# Altium PCB Helmet_HUD.PcbDoc
Units mil, origin at the board's own origin, x right, y up, seen from the top; angles counter-clockwise.
Board outline 1673.23 x 2559.06 mil, 4 copper layers (Top Layer, GND_1, GND_2, Bottom Layer), stack 22.378 mil thick; 21 components, 21 nets, 87 pads, 858 vias.
Unrouted connection lines stored in the file: 1.
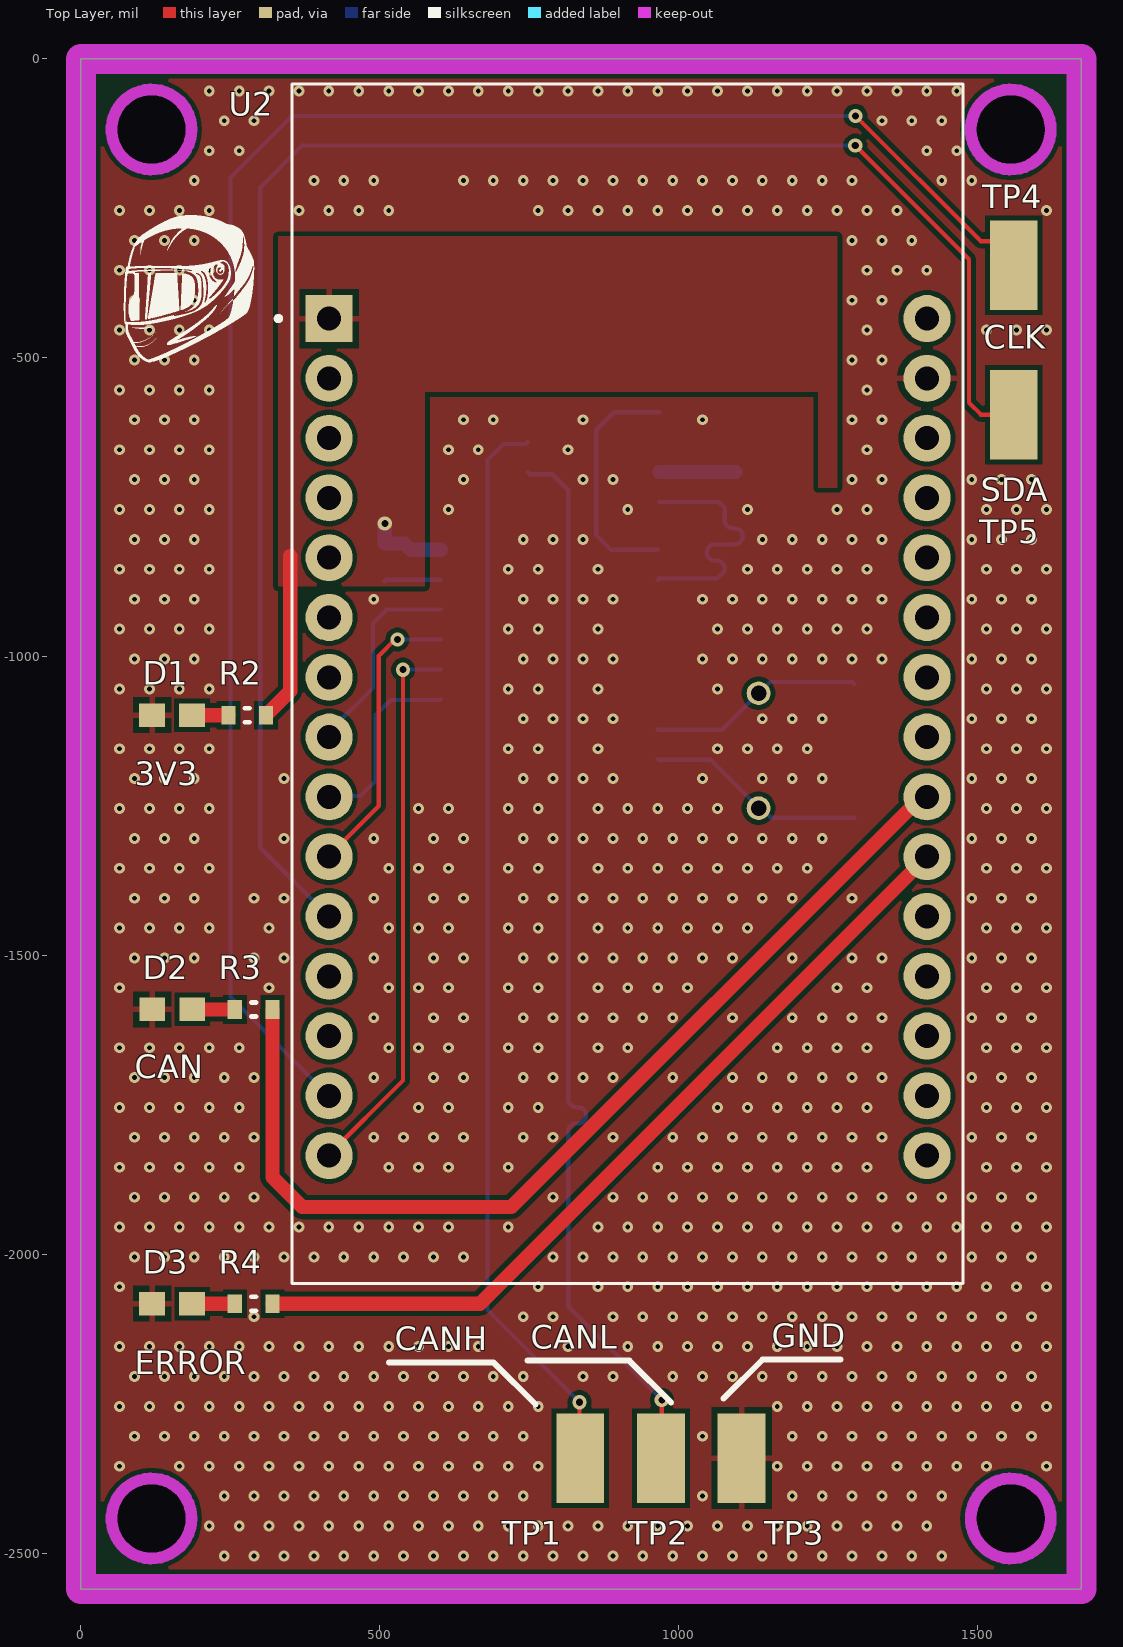
[diagram p0: Top Layer view]
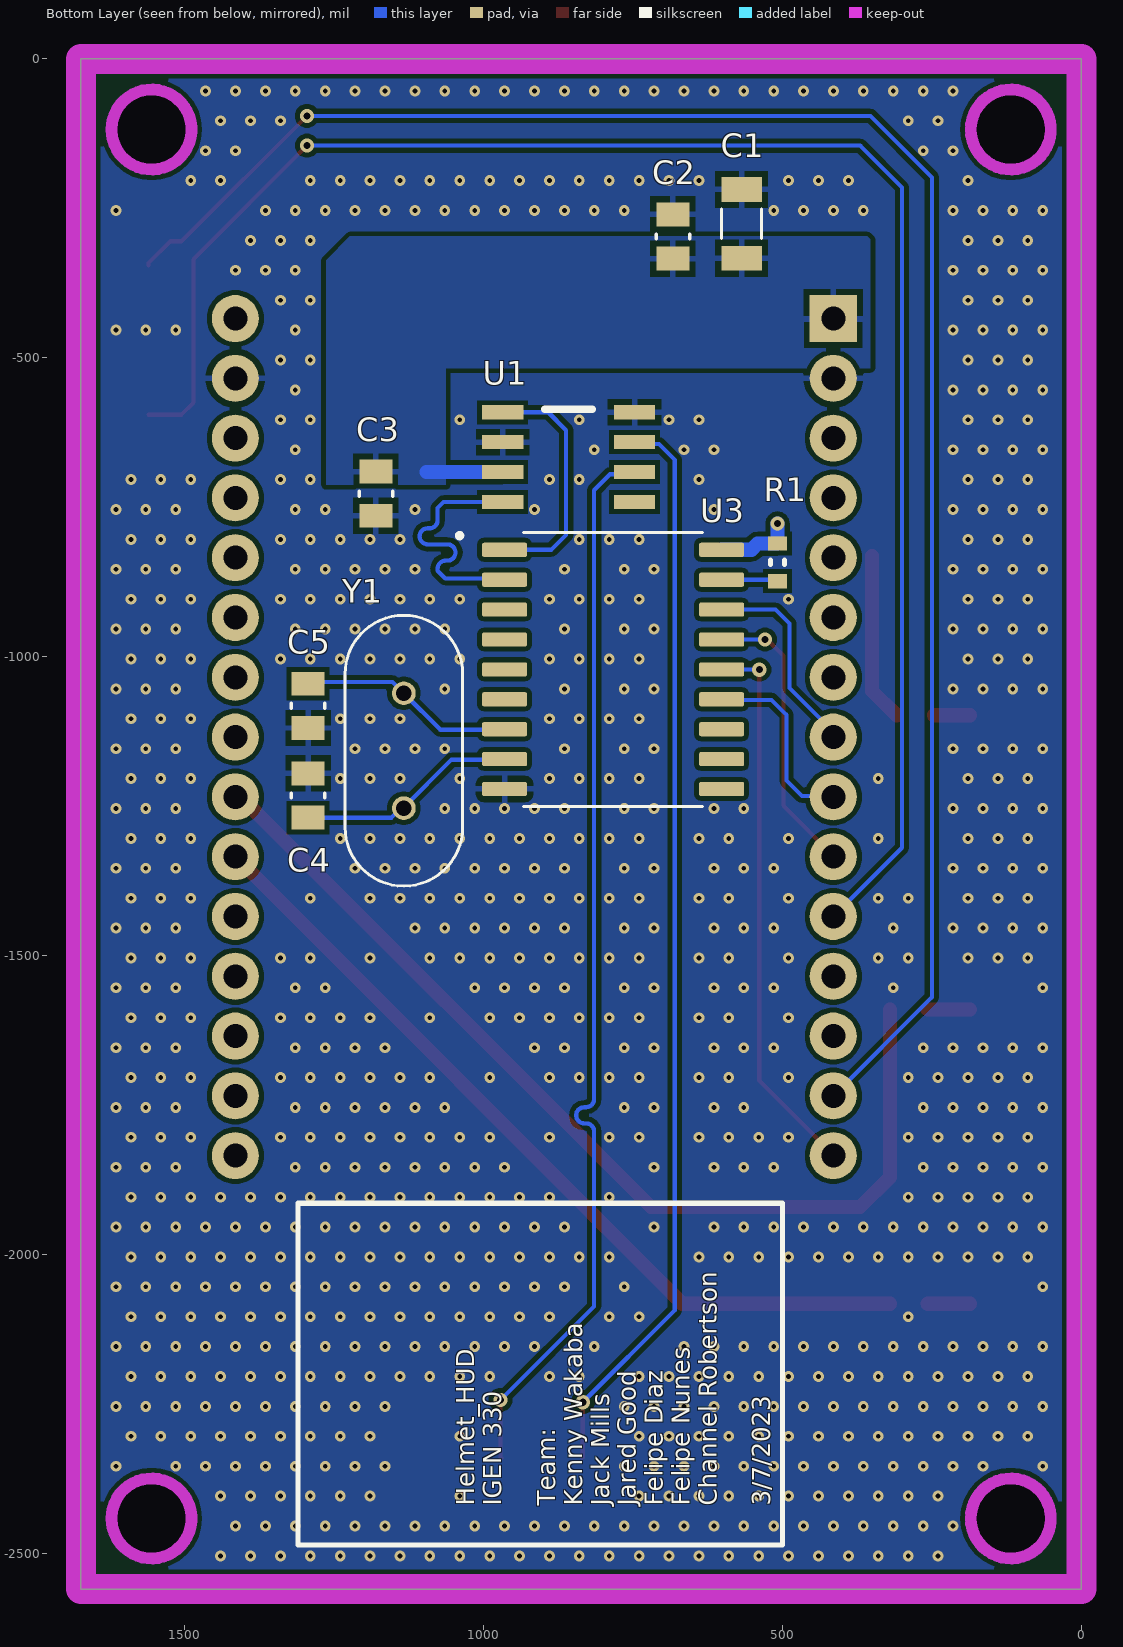
[diagram p1: Bottom Layer view, seen from below]
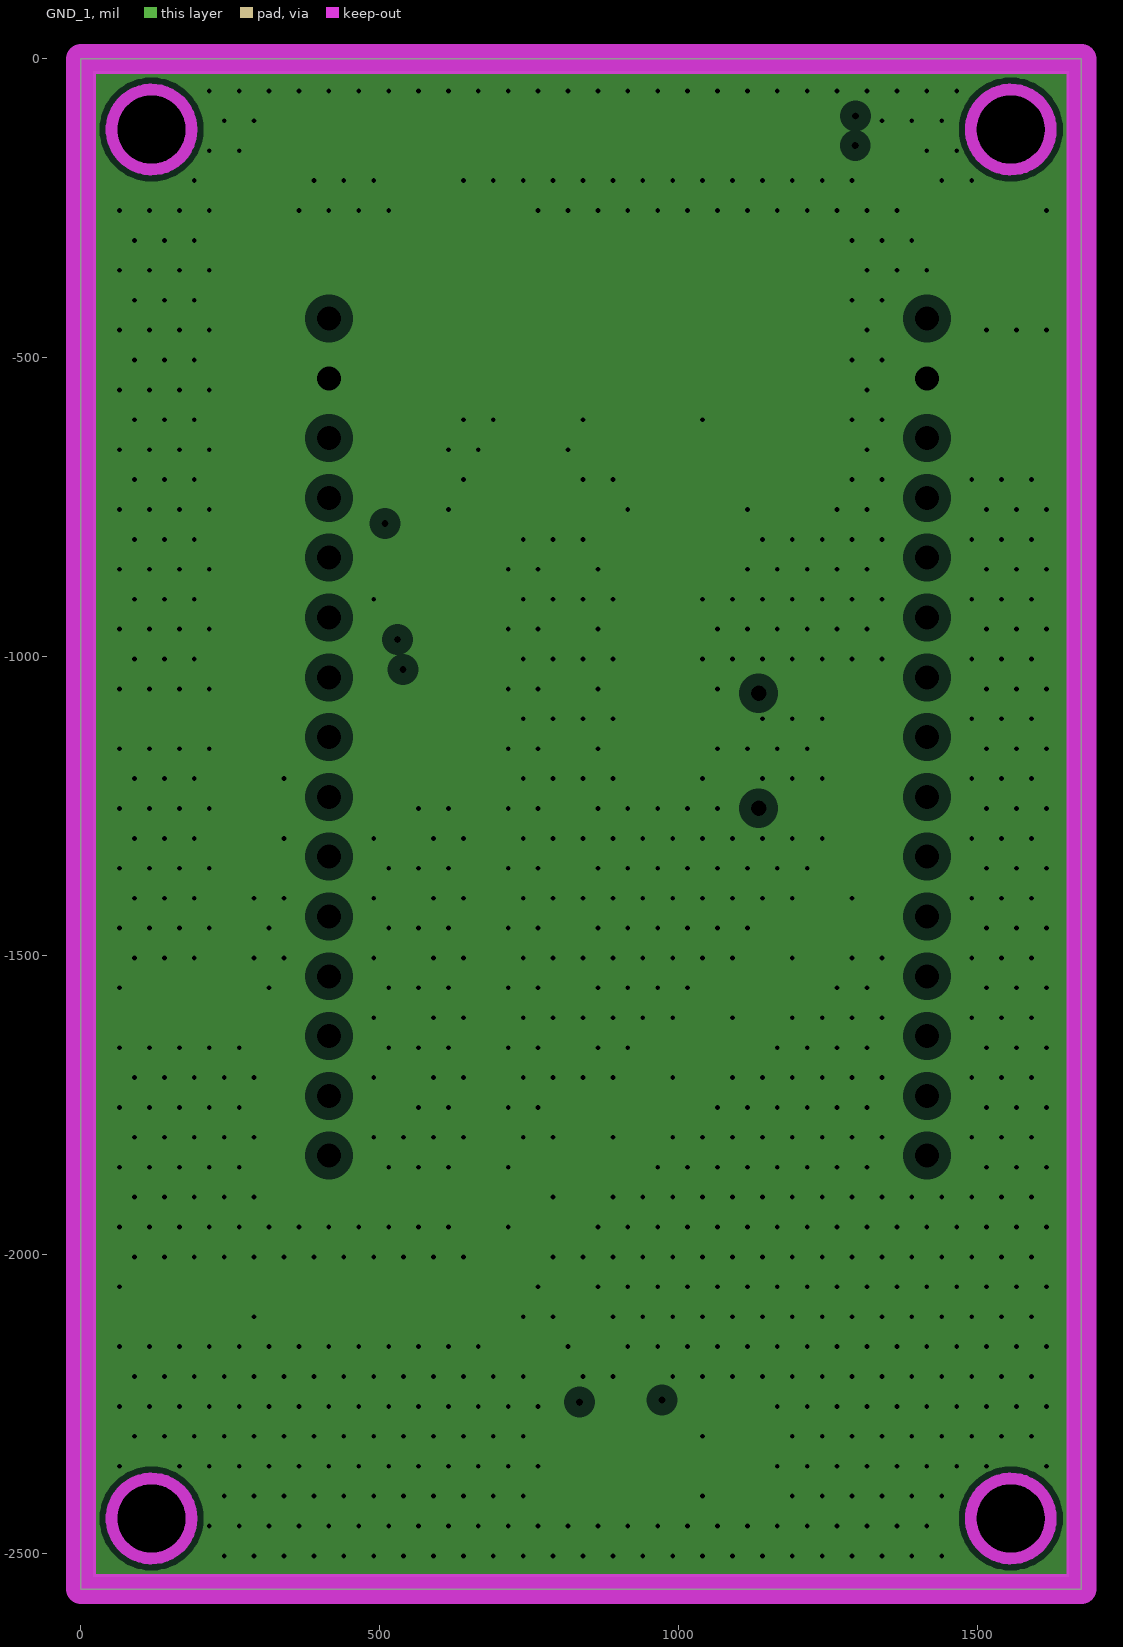
[diagram p2: GND_1, clearances drawn from the general rule]
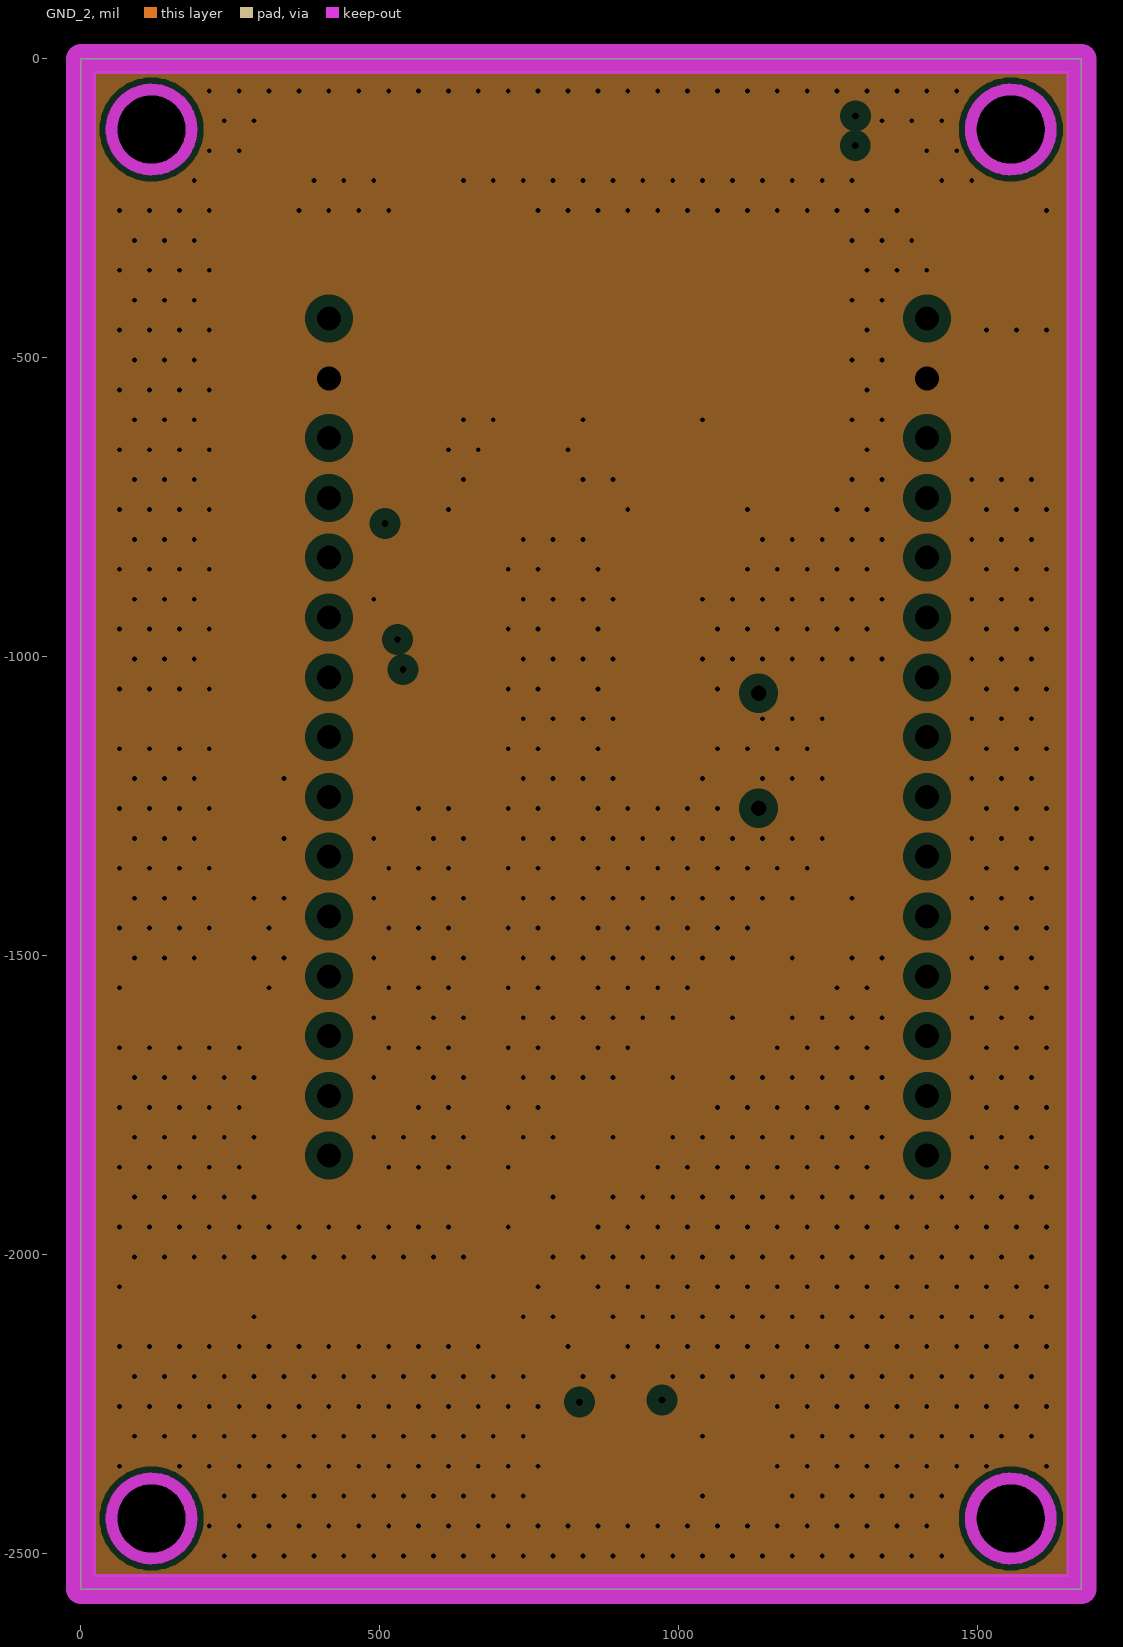
[diagram p3: GND_2, clearances drawn from the general rule]

## Layer stack, top to bottom
Top Solder: solder mask 0.4, Solder Resist, Dk 3.5
Top Layer: signal copper 1.4
Dielectric 2: prepreg 2.8, PP-006, Dk 4.1
GND_1: plane copper 0.689, net GND
Dielectric 1: dielectric 12.6, FR-4, Dk 4.8
GND_2: plane copper 0.689, net GND
Dielectric 3: prepreg 2.8, PP-006, Dk 4.1
Bottom Layer: signal copper 1.4
Bottom Solder: solder mask 0.4, Solder Resist, Dk 3.5

## Board outline
0,-2559.06 0,0 1673.23,0 1673.23,-2559.06
cut-out: 51.18,-118.11 ccw(c118.11,-118.11) 118.11,-185.04 ccw(c118.11,-118.11) 185.04,-118.11 ccw(c118.11,-118.11) 118.11,-51.18 ccw(c118.11,-118.11)
cut-out: 1488.19,-118.11 ccw(c1555.12,-118.11) 1555.12,-185.04 ccw(c1555.12,-118.11) 1622.05,-118.11 ccw(c1555.12,-118.11) 1555.12,-51.18 ccw(c1555.12,-118.11)
cut-out: 1488.19,-2440.94 ccw(c1555.12,-2440.94) 1555.12,-2507.87 ccw(c1555.12,-2440.94) 1622.05,-2440.94 ccw(c1555.12,-2440.94) 1555.12,-2374.02 ccw(c1555.12,-2440.94)
cut-out: 51.18,-2440.94 ccw(c118.11,-2440.94) 118.11,-2507.87 ccw(c118.11,-2440.94) 185.04,-2440.94 ccw(c118.11,-2440.94) 118.11,-2374.02 ccw(c118.11,-2440.94)

## Design rules (kind name [scope] priority, off if disabled: settings)
Clearance [All] p1: gap=7.87 ignorepadtopadclearanceinfootprint=FALSE
DiffPairsRouting [All] p1: maxlimit=10 minlimit=10 mostfreqgap=10 toplayer_minwidth=15 toplayer_maxwidth=15 toplayer_prefwidth=15 bottomlayer_minwidth=15 bottomlayer_maxwidth=15 bottomlayer_prefwidth=15 maxuncoupledlength=500
HoleSize [All] p1: absolutevalues=TRUE maxlimit=100 minlimit=11.81 maxpercent=80.000 minpercent=20.000
HoleToHoleClearance ViaToViaClearance [IsVia vs IsVia] p1: gap=10 allowstackedmicrovias=TRUE
HoleToHoleClearance [All] p2: gap=19.68 allowstackedmicrovias=TRUE
MatchedLengths CAN [InDifferentialPair('CAN')] p1: tolerance=3.94 checknetsindiffpair=FALSE checkdiffpairvsdiffpair=TRUE checkxsignals=TRUE checkothers=TRUE
PlaneClearance [All] p1: clearance=20
PlaneConnect PlaneConnect_Via [IsVia] p1: planeconnectstyle=Direct reliefexpansion=20 reliefentries=4 reliefconductorwidth=10 reliefairgap=10
PlaneConnect [All] p2: planeconnectstyle=Relief reliefexpansion=20 reliefentries=4 reliefconductorwidth=10 reliefairgap=10
PolygonConnect PolygonConnect_Via [IsVia] p1: connectstyle=Direct reliefconductorwidth=10 reliefentries=4 polygonreliefangle="90 Angle" airgapwidth=10
PolygonConnect [All] p2: connectstyle=Relief reliefconductorwidth=10 reliefentries=4 polygonreliefangle="90 Angle" airgapwidth=10
RoutingVias [All] p1: holewidth=28 width=50 viastyle="Through Hole" minholewidth=7.87 minwidth=19.68 maxholewidth=11.81 maxwidth=23.62
SilkToSolderMaskClearance [IsPad] p1: minsilkscreentomaskgap=5.91 clearancetoexposedcopper=TRUE
SolderMaskExpansion SolderMaskExpansion_Via [IsVia] p1: expansion=4 istentingtop=TRUE
SolderMaskExpansion [All] p2: expansion=4 istentingtop=FALSE
Width [All] p1: maxlimit=39.37 minlimit=5 preferedwidth=7.01 minimp=50.000000 maximp=50.000000 favimp=50.000000
24 further rules are at their usual default settings.

## Classes and differential pairs
differential pair CAN: +CAN_P -CAN_N

## Components (designator, comment, footprint, x,y, rotation, side; value= is the part's Value field where it differs from the comment)
C1 "10uF" 1206 568.23,-275.82 r270 bottom
C2 "0.10uF" 0805 683.23,-296.97 r270 bottom
C3 "0.10uF" 0805 1180,-727 r90 bottom
C4 "22pF" 0805 1293.23,-1231.97 r270 bottom
C5 "22pF" 0805 1293.23,-1081.97 r90 bottom
D1 "LTST-C191KGKT" 0603#1 152.53,-1097.59 r0 top
D2 "LTST-C191KGKT" 0603#1 152.7,-1589.71 r0 top
D3 "LTST-C191KGKT" 0603#1 152.63,-2081.84 r0 top
R1 "10k" 0603#2 508.23,-841.97 r90 bottom
R2 "100" 0603#2 278.03,-1097.59 r0 top
R3 "100" 0603#2 288.86,-1589.8 r0 top
R4 "100" 0603#2 288.86,-2081.84 r0 top
TP1 "Test Point - 5019" TP380X203#1 835,-2340 r90 top
TP2 "Test Point - 5019" TP380X203#1 970,-2340 r90 top
TP3 "Test Point - 5019" TP380X203#1 1105,-2340 r90 top
TP4 "Test Point - 5019" TP380X203#2 1560,-345 r270 bottom
TP5 "Test Point - 5019" TP380X203#2 1560,-595 r270 bottom
U1 "TJA1050" SOP8 857.61,-665.97 r270 bottom
U2 "ESP32-DEVKIT-V1" MODULE_ESP32_DEVKIT_V1 915,-1045 r0 top locked
U3 "MCP2515-I/SO" SOIC127P1030X265-18N 783.2,-1020.97 r180 bottom
Y1 "ABL-8.000MHZ-B2" XTAL_HC49P488W46L1150T500H350 1133.23,-1156.97 r90 bottom

## Footprints (in the part's own frame and the unit in brackets; to place one, negate y for a bottom-side part, rotate by r counter-clockwise, add the part's x,y. Pads: shape width x height; smd on the part's side, far side on the other; paste and mask are expansions set on the pad)
0603#1 [mm]
  rect 1.1x1 smd: 1(-0.85,0) 2(0.85,0)
  body extent -0.8,-0.4 0.8,0.4, height 0.55
0603#2 [mm] "Chip Resistor, 2-Leads, Body 1.60x0.80mm, IPC High Density"
  rect 0.6x0.8 smd mask+0.1: 1(-0.8,0) 2(0.8,0)
  silkscreen extent -0.1,-0.3 0.1,0.3, body extent -0.8,-0.4 0.8,0.4, height 0.6
0805 [mil]
  rect 40x55 smd: 1(-37,0) 2(37,0)
  silkscreen extent -4,-28 4,28, body extent -47,-28 47,28, height 24
1206 [mm]
  rect 1.05x1.72 smd: 1(-1.46,0) 2(1.46,0)
  silkscreen extent -0.62,-0.85 0.62,0.85, body extent -1.6,-0.8 1.6,0.8, height 1.61
MODULE_ESP32_DEVKIT_V1 [mm]
  rect 2x2 / inner round 2 / far side rect 2x2 hole 1.02: 1(-12.7,15.515)
  round 2 hole 1.02: 2(-12.7,12.975) 3(-12.7,10.435) 4(-12.7,7.895) 5(-12.7,5.355) 6(-12.7,2.815) 7(-12.7,0.275) 8(-12.7,-2.265) 9(-12.7,-4.805) 10(-12.7,-7.345) 11(-12.7,-9.885) 12(-12.7,-12.425) 13(-12.7,-14.965) 14(-12.7,-17.505) 15(-12.7,-20.045) 16(12.7,-20.045) 17(12.7,-17.505) 18(12.7,-14.965) 19(12.7,-12.425) 20(12.7,-9.885) 21(12.7,-7.345) 22(12.7,-4.805) 23(12.7,-2.265) 24(12.7,0.275) 25(12.7,2.815) 26(12.7,5.355) 27(12.7,7.895) 28(12.7,10.435) 29(12.7,12.975) 30(12.7,15.515)
  silkscreen extent -14.95,-25.48 14.23,25.48
SOIC127P1030X265-18N [mm]
  rrect25% 1.91x0.6 smd: 1(-4.61,5.08) 2(-4.61,3.81) 3(-4.61,2.54) 4(-4.61,1.27) 5(-4.61,0) 6(-4.61,-1.27) 7(-4.61,-2.54) 8(-4.61,-3.81) 9(-4.61,-5.08) 10(4.61,-5.08) 11(4.61,-3.81) 12(4.61,-2.54) 13(4.61,-1.27) 14(4.61,0) 15(4.61,1.27) 16(4.61,2.54) 17(4.61,3.81) 18(4.61,5.08)
  silkscreen extent -6.62,-5.82 3.8,5.82
SOP8 [mm]
  rect 0.6x1.75 smd: 1(-1.905,-2.8) 2(-0.635,-2.8) 3(0.635,-2.8) 4(1.905,-2.8) 5(1.905,2.8) 6(0.635,2.8) 7(-0.635,2.8) 8(-1.905,2.8)
  silkscreen extent -2.03,-1.02 -2.03,1.02
TP380X203#1 [mm]
  rect 3.8x2.03 smd: 1(0,0)
TP380X203#2 [mm]
  rect 3.8x2.03 smd far side: 1(0,0)
XTAL_HC49P488W46L1150T500H350 [mm]
  round 1.007 hole 0.657: 1(-2.44,0) 2(2.44,0)
  silkscreen extent -5.75,-2.5 5.75,2.5, body extent -5.75,-2.5 5.75,2.5, height 3.25

## Part data
C1: library part "CAP 10uF 25V", "Default Symbol for Capacitors", Rating=25V, Temperature Coefficient=X5R, Tolerance=10%, Part Number="CAP 10uF 25V"
C2 C3: library part "CAP 0.10uF 35V", "CAP CER 0.10UF 35V X7R 0805", Manufacturer Part Number 1=GMK107B7104KAHT, Manufacturer Part Number 2=GMK212BJ104KGHT, Operating Temperature="-55°C ~ 125°C", Package=0805, Rating=35V, Supplier Part Number 1=587-3354-1-ND, Temperature Coefficient=X7R, Tolerance=10%, Part Number="CAP 0.10uF 35V", Supplier 1=Digi-Key, Supplier 2=Digi-Key, Supplier Part Number 2=587-3364-1-ND
C4 C5: library part "CAP 22pF 50V", "Default Symbol for Capacitors", Rating=50V, Temperature Coefficient=X7R, Tolerance=10%, Part Number="CAP 22pF 50V"
D1 D2 D3: "Green 571nm LED Indication - Discrete 2V 0603 (1608 Metric)", Package="0603 Lite-On Inc.", Check_prices=https://www.snapeda.com/parts/LTST-C191KGKT/Lite-On+Inc./view-part/?ref=eda, Digi-Key_Part_Number=160-1446-2-ND, MF="Lite-On Inc.", MP=LTST-C191KGKT, Purchase-URL=https://pricing.snapeda.com/search/part/LTST-C191KGKT/?ref=eda, SnapEDA_Link=https://www.snapeda.com/parts/LTST-C191KGKT/Lite-On+Inc./view-part/?ref=snap
R1: library part "RES 10k 1/8W - 1%", "RES SMD 10K OHM 1% 1/8W 0603", Manufacturer Part Number 1=ERJ-H3GJ103V, Manufacturer Part Number 2=RMCF0805JT10K0, Package=0805, Power (Watts)=0.125W, Supplier Part Number 1=10-ERJ-H3GJ103VCT-ND, Tolerance=5%, Part Number="RES 10k 1/8W - 1%", Supplier 1=Digi-Key, Supplier 2=Digi-Key, Supplier Part Number 2=RMCF0805JT10K0CT-ND, Supplier URL 1=https://www.digikey.ca/en/products/detail/panasonic-electronic-components/ERJ-H3GJ103V/13877876?s=N4IgTCBcDaIIwAYC0BRASgKSQCQMwHENFcA1AYQBUkA5AERAF0BfIA, Supplier URL 2=https://www.digikey.ca/en/products/detail/stackpole-electronics-inc/RMCF0805JT10K0/1757762?s=N4IgTCBcDaIEoFkDCAxADADjQVgFIBUBGNAaTSXxAF0BfIA, Tolerance 2=5%
R2 R3 R4: library part "RES 100.0 1/8W - 5%", "Default Resistor Symbol", Manufacturer Part Number 1=RK73B1JRTTD101J, Manufacturer Part Number 2=RMCF0805JT100R, Package=0805, Power (Watts)=0.125W, Supplier Part Number 1=2019-RK73B1JRTTD101JCT-ND, Tolerance=5%, Part Number="RES 100.0 1/8W - 5%", Supplier 1=Digi-Key, Supplier 2=Digi-Key, Supplier Part Number 2=RMCF0805JT100RCT-ND, Supplier URL 1=https://www.digikey.ca/en/products/detail/koa-speer-electronics-inc/RK73B1JRTTD101J/12156165?s=N4IgTCBcDaIEoGkDsBmAQgRgFJwCq4BEMAGbAYVxAF0BfIA, Supplier URL 2=https://www.digikey.ca/en/products/detail/stackpole-electronics-inc/RMCF0805JT100R/1757756?s=N4IgTCBcDaIEoFkDCAxADADjQVgFIBUBGNNOJfEAXQF8g, Tolerance 2=5%
TP1 TP2 TP3 TP4 TP5: "PC Test Point, Miniature Phosphor Bronze, Silver Plating Surface Mount Mounting Type", Package="2010 Keystone", MF="Keystone Electronics", MP=5019, Part Number="Test Point - 5019"
U1: "1/1 Transceiver Half CANbus 8-SO", Package="SOIC-8 NXP Semiconductors", Availability="In Stock", Check_prices=https://www.snapeda.com/parts/TJA1050/NXP%20USA%20Inc./view-part/562764/?ref=eda, MF="NXP USA", MP=TJA1050, Price=None, Purchase-URL=https://pricing.snapeda.com/search/part/TJA1050/?ref=eda, SnapEDA_Link=https://www.snapeda.com/parts/TJA1050/NXP%20USA%20Inc./view-part/562764/?ref=snap
U2: "Dual core, Wi-Fi: 2.4 GHz up to 150 Mbits/s,BLE (Bluetooth Low Energy) and legacy Bluetooth, 32 bits, Up to 240 MHz", Package=None, Availability="Not in stock", Check_prices=https://www.snapeda.com/parts/ESP32-DEVKIT-V1/Do+it/view-part/?ref=eda, MF="Do it", MP=ESP32-DEVKIT-V1, Price=None, SnapEDA_Link=https://www.snapeda.com/parts/ESP32-DEVKIT-V1/Do+it/view-part/?ref=snap
U3: "CANbus Controller CAN 2.0 SPI Interface 18-SOIC", Package="SOIC-18 Microchip", Availability=Unavailable, MF=Microchip, MP=MCP2515-I/SO, Price=None, SnapEDA_Link=https://www.snapeda.com/parts/MCP2515-I/SO/Microchip/view-part/50301/?ref=snap
Y1: "HC/49US (AT49) MICROPROCESSOR CRYSTAL", Package="HC-49/US ABRACON", Availability="In Stock", Check_prices=https://www.snapeda.com/parts/ABL-8.000MHZ-B2/Abracon+LLC/view-part/?ref=eda, MF=Abracon, MP=ABL-8.000MHZ-B2, Price=None, Purchase-URL=https://pricing.snapeda.com/search/part/ABL-8.000MHZ-B2/?ref=eda, SnapEDA_Link=https://www.snapeda.com/parts/ABL-8.000MHZ-B2/Abracon+LLC/view-part/?ref=snap

## Via types
v1: diameter 18, hole 8, Top Layer to Bottom Layer, tented both sides, 851 vias
v2: diameter 23.62, hole 11.81, Top Layer to Bottom Layer, tented both sides, 7 vias

## Nets (pads, with @x,y where several pads share a name; then routed paths per layer and width w, separated by ;. In a path a pad name is that pad's centre, name@x,y a point inside that pad or via, vN(x,y) a via of type N, cw(c..) or ccw(c..) an arc to the next point about the centre after c; other vN are vias at no path point)
CAN_N: U1.4 U3.2 | length 421.5
  Bottom Layer w7.01: U3.2 966.8,-868.87 1063.83,-868.87 1076.73,-855.97 1076.73,-852.46 ccw(c1063.23,-852.46) 1063.23,-838.96 1060.23,-838.96 cw(c1060.23,-825.46) 1046.73,-825.46 cw(c1060.23,-825.46) 1060.23,-811.95 1093.23,-811.95 ccw(c1093.23,-798.45) 1106.73,-798.45 ccw(c1093.23,-798.45) 1093.23,-784.94 1090.23,-784.94 cw(c1090.23,-771.44) 1076.73,-771.44 1076.73,-750.97 1066.73,-740.97 U1.4
CAN_P: U1.1 U3.1 | length 406.9
  Bottom Layer w7: U3.1 886.73,-820.97 861.73,-795.97 861.73,-620.97 891.73,-590.97 U1.1
CANH: TP1.1 U1.7 | length 1813.2
  Top Layer w7: v2(833.9,-2246.54) 833.9,-2338.9 TP1.1
  Bottom Layer w7: U1.7 744.15,-644.2 706.53,-644.2 680,-670.73 680,-1892.97 679.99,-2092.63 v2(833.9,-2246.54)
CANL: TP2.1 U1.6 | length 1801.1
  Top Layer w7: TP2.1 971.48,-2338.52 v2(971.48,-2242.78)
  Bottom Layer w7: U1.6 751.03,-694.62 788.22,-694.62 815,-721.4 815,-1736.21 815,-1739.71 ccw(c828.5,-1739.71) 828.5,-1753.21 831.5,-1753.21 cw(c831.5,-1766.71) 831.5,-1780.21 828.5,-1780.21 ccw(c828.5,-1793.71) 815,-1793.71 815,-1872.88 815,-1883.47 815,-2086.3 v2(971.48,-2242.78)
CS: U2.8 U3.16 | length 342.2
  Bottom Layer w7: U2.8@414.5,-1132.73 414.5,-1125.7 488.23,-1051.97 488.23,-944.16 511.42,-920.97 U3.16
ERROR_LED: R4.2 U2.21 | length 1404.3
  Top Layer w23.62: R4.2 667.34,-2081.84 U2.21
FAULT_LED: R3.2 U2.22 | length 1680
  Top Layer w23.62: R3.2 320.35,-1870.35 370.22,-1920.22 719.78,-1920.22 1405.83,-1234.17 U2.22
GND: C1.1 C2.1 C3.1 C4.1 C5.1 D1.1 D2.1 D3.1 TP3.1 U1.2 U1.8 U2.2 U2.29 U3.9
  other v1: 239.66,-2503.56 289.66,-2503.56 339.66,-2503.56 389.66,-2503.56 439.66,-2503.56 489.66,-2503.56 539.66,-2503.56 589.66,-2503.56 639.66,-2503.56 689.66,-2503.56 739.66,-2503.56 789.66,-2503.56 839.66,-2503.56 889.66,-2503.56 939.66,-2503.56 989.66,-2503.56 1039.66,-2503.56 1089.66,-2503.56 1139.66,-2503.56 1189.66,-2503.56 1239.66,-2503.56 1289.66,-2503.56 1339.66,-2503.56 1389.66,-2503.56 1439.66,-2503.56 214.66,-2453.56 264.66,-2453.56 314.66,-2453.56 364.66,-2453.56 414.66,-2453.56 464.66,-2453.56 514.66,-2453.56 564.66,-2453.56 614.66,-2453.56 664.66,-2453.56 714.66,-2453.56 764.66,-2453.56 814.66,-2453.56 864.66,-2453.56 914.66,-2453.56 964.66,-2453.56 1014.66,-2453.56 1064.66,-2453.56 1114.66,-2453.56 1164.66,-2453.56 1214.66,-2453.56 1264.66,-2453.56 1314.66,-2453.56 1364.66,-2453.56 1414.66,-2453.56 239.66,-2403.56 289.66,-2403.56 339.66,-2403.56 389.66,-2403.56 439.66,-2403.56 489.66,-2403.56 539.66,-2403.56 589.66,-2403.56 639.66,-2403.56 689.66,-2403.56 739.66,-2403.56 1039.66,-2403.56 1189.66,-2403.56 1239.66,-2403.56 1289.66,-2403.56 1339.66,-2403.56 1389.66,-2403.56 1439.66,-2403.56 64.66,-2353.56 164.66,-2353.56 214.66,-2353.56 264.66,-2353.56 314.66,-2353.56 364.66,-2353.56 414.66,-2353.56 464.66,-2353.56 514.66,-2353.56 564.66,-2353.56 614.66,-2353.56 664.66,-2353.56 714.66,-2353.56 764.66,-2353.56 1164.66,-2353.56 1214.66,-2353.56 1264.66,-2353.56 1314.66,-2353.56 1364.66,-2353.56 1414.66,-2353.56 1464.66,-2353.56 1514.66,-2353.56 1614.66,-2353.56 89.66,-2303.56 139.66,-2303.56 189.66,-2303.56 239.66,-2303.56 289.66,-2303.56 339.66,-2303.56 389.66,-2303.56 439.66,-2303.56 489.66,-2303.56 539.66,-2303.56 589.66,-2303.56 639.66,-2303.56 689.66,-2303.56 739.66,-2303.56 1039.66,-2303.56 1189.66,-2303.56 1239.66,-2303.56 1289.66,-2303.56 1339.66,-2303.56 1389.66,-2303.56 1439.66,-2303.56 1489.66,-2303.56 1539.66,-2303.56 1589.66,-2303.56 64.66,-2253.56 114.66,-2253.56 164.66,-2253.56 214.66,-2253.56 264.66,-2253.56 314.66,-2253.56 364.66,-2253.56 414.66,-2253.56 464.66,-2253.56 514.66,-2253.56 564.66,-2253.56 614.66,-2253.56 664.66,-2253.56 714.66,-2253.56 764.66,-2253.56 1164.66,-2253.56 1214.66,-2253.56 1264.66,-2253.56 1314.66,-2253.56 1364.66,-2253.56 1414.66,-2253.56 1464.66,-2253.56 1514.66,-2253.56 1564.66,-2253.56 1614.66,-2253.56 89.66,-2203.56 139.66,-2203.56 189.66,-2203.56 239.66,-2203.56 289.66,-2203.56 339.66,-2203.56 389.66,-2203.56 439.66,-2203.56 489.66,-2203.56 539.66,-2203.56 589.66,-2203.56 639.66,-2203.56 689.66,-2203.56 739.66,-2203.56 839.66,-2203.56 889.66,-2203.56 989.66,-2203.56 1039.66,-2203.56 1089.66,-2203.56 1139.66,-2203.56 1189.66,-2203.56 1239.66,-2203.56 1289.66,-2203.56 1339.66,-2203.56 1389.66,-2203.56 1439.66,-2203.56 1489.66,-2203.56 1539.66,-2203.56 1589.66,-2203.56 64.66,-2153.56 114.66,-2153.56 164.66,-2153.56 214.66,-2153.56 264.66,-2153.56 314.66,-2153.56 364.66,-2153.56 414.66,-2153.56 464.66,-2153.56 514.66,-2153.56 564.66,-2153.56 614.66,-2153.56 664.66,-2153.56 814.66,-2153.56 914.66,-2153.56 964.66,-2153.56 1014.66,-2153.56 1064.66,-2153.56 1114.66,-2153.56 1164.66,-2153.56 1214.66,-2153.56 1264.66,-2153.56 1314.66,-2153.56 1364.66,-2153.56 1414.66,-2153.56 1464.66,-2153.56 1514.66,-2153.56 1564.66,-2153.56 1614.66,-2153.56 289.66,-2103.56 739.66,-2103.56 789.66,-2103.56 889.66,-2103.56 939.66,-2103.56 989.66,-2103.56 1039.66,-2103.56 1089.66,-2103.56 1139.66,-2103.56 1189.66,-2103.56 1239.66,-2103.56 1289.66,-2103.56 1339.66,-2103.56 1389.66,-2103.56 1439.66,-2103.56 1489.66,-2103.56 1539.66,-2103.56 1589.66,-2103.56 64.66,-2053.56 764.66,-2053.56 864.66,-2053.56 914.66,-2053.56 964.66,-2053.56 1014.66,-2053.56 1064.66,-2053.56 1114.66,-2053.56 1164.66,-2053.56 1214.66,-2053.56 1264.66,-2053.56 1314.66,-2053.56 1364.66,-2053.56 1414.66,-2053.56 1464.66,-2053.56 1514.66,-2053.56 1564.66,-2053.56 1614.66,-2053.56 89.66,-2003.56 139.66,-2003.56 189.66,-2003.56 239.66,-2003.56 289.66,-2003.56 339.66,-2003.56 389.66,-2003.56 439.66,-2003.56 489.66,-2003.56 539.66,-2003.56 589.66,-2003.56 639.66,-2003.56 789.66,-2003.56 839.66,-2003.56 889.66,-2003.56 939.66,-2003.56 989.66,-2003.56 1039.66,-2003.56 1089.66,-2003.56 1139.66,-2003.56 1189.66,-2003.56 1239.66,-2003.56 1289.66,-2003.56 1339.66,-2003.56 1389.66,-2003.56 1439.66,-2003.56 1489.66,-2003.56 1539.66,-2003.56 1589.66,-2003.56 64.66,-1953.56 114.66,-1953.56 164.66,-1953.56 214.66,-1953.56 264.66,-1953.56 314.66,-1953.56 364.66,-1953.56 414.66,-1953.56 464.66,-1953.56 514.66,-1953.56 564.66,-1953.56 614.66,-1953.56 714.66,-1953.56 864.66,-1953.56 914.66,-1953.56 964.66,-1953.56 1014.66,-1953.56 1064.66,-1953.56 1114.66,-1953.56 1164.66,-1953.56 1214.66,-1953.56 1264.66,-1953.56 1314.66,-1953.56 1364.66,-1953.56 1414.66,-1953.56 1464.66,-1953.56 1514.66,-1953.56 1564.66,-1953.56 1614.66,-1953.56 89.66,-1903.56 139.66,-1903.56 189.66,-1903.56 239.66,-1903.56 289.66,-1903.56 789.66,-1903.56 889.66,-1903.56 939.66,-1903.56 989.66,-1903.56 1039.66,-1903.56 1089.66,-1903.56 1139.66,-1903.56 1189.66,-1903.56 1239.66,-1903.56 1289.66,-1903.56 1339.66,-1903.56 1389.66,-1903.56 1439.66,-1903.56 1489.66,-1903.56 1539.66,-1903.56 1589.66,-1903.56 64.66,-1853.56 114.66,-1853.56 164.66,-1853.56 214.66,-1853.56 264.66,-1853.56 514.66,-1853.56 564.66,-1853.56 614.66,-1853.56 714.66,-1853.56 964.66,-1853.56 1014.66,-1853.56 1064.66,-1853.56 1114.66,-1853.56 1164.66,-1853.56 1214.66,-1853.56 1264.66,-1853.56 1314.66,-1853.56 1514.66,-1853.56 1564.66,-1853.56 1614.66,-1853.56 89.66,-1803.56 139.66,-1803.56 189.66,-1803.56 239.66,-1803.56 289.66,-1803.56 489.66,-1803.56 539.66,-1803.56 589.66,-1803.56 639.66,-1803.56 739.66,-1803.56 789.66,-1803.56 889.66,-1803.56 989.66,-1803.56 1039.66,-1803.56 1089.66,-1803.56 1139.66,-1803.56 1189.66,-1803.56 1239.66,-1803.56 1289.66,-1803.56 1339.66,-1803.56 1489.66,-1803.56 1539.66,-1803.56 1589.66,-1803.56 64.66,-1753.56 114.66,-1753.56 164.66,-1753.56 214.66,-1753.56 264.66,-1753.56 564.66,-1753.56 614.66,-1753.56 714.66,-1753.56 764.66,-1753.56 1064.66,-1753.56 1114.66,-1753.56 1164.66,-1753.56 1214.66,-1753.56 1264.66,-1753.56 1314.66,-1753.56 1514.66,-1753.56 1564.66,-1753.56 1614.66,-1753.56 89.66,-1703.56 139.66,-1703.56 189.66,-1703.56 239.66,-1703.56 289.66,-1703.56 489.66,-1703.56 589.66,-1703.56 639.66,-1703.56 739.66,-1703.56 789.66,-1703.56 839.66,-1703.56 889.66,-1703.56 989.66,-1703.56 1089.66,-1703.56 1139.66,-1703.56 1189.66,-1703.56 1239.66,-1703.56 1289.66,-1703.56 1339.66,-1703.56 1489.66,-1703.56 1539.66,-1703.56 1589.66,-1703.56 64.66,-1653.56 114.66,-1653.56 164.66,-1653.56 214.66,-1653.56 264.66,-1653.56 514.66,-1653.56 564.66,-1653.56 614.66,-1653.56 714.66,-1653.56 764.66,-1653.56 864.66,-1653.56 914.66,-1653.56 1164.66,-1653.56 1214.66,-1653.56 1264.66,-1653.56 1314.66,-1653.56 1514.66,-1653.56 1564.66,-1653.56 1614.66,-1653.56 489.66,-1603.56 589.66,-1603.56 639.66,-1603.56 739.66,-1603.56 789.66,-1603.56 839.66,-1603.56 889.66,-1603.56 939.66,-1603.56 989.66,-1603.56 1089.66,-1603.56 1189.66,-1603.56 1239.66,-1603.56 1289.66,-1603.56 1339.66,-1603.56 1489.66,-1603.56 1539.66,-1603.56 1589.66,-1603.56 64.66,-1553.56 314.66,-1553.56 514.66,-1553.56 564.66,-1553.56 614.66,-1553.56 714.66,-1553.56 764.66,-1553.56 864.66,-1553.56 914.66,-1553.56 964.66,-1553.56 1014.66,-1553.56 1264.66,-1553.56 1314.66,-1553.56 1514.66,-1553.56 1564.66,-1553.56 1614.66,-1553.56 89.66,-1503.56 139.66,-1503.56 189.66,-1503.56 289.66,-1503.56 339.66,-1503.56 489.66,-1503.56 589.66,-1503.56 639.66,-1503.56 739.66,-1503.56 789.66,-1503.56 839.66,-1503.56 889.66,-1503.56 939.66,-1503.56 989.66,-1503.56 1039.66,-1503.56 1089.66,-1503.56 1189.66,-1503.56 1289.66,-1503.56 1339.66,-1503.56 1489.66,-1503.56 1539.66,-1503.56 1589.66,-1503.56 64.66,-1453.56 114.66,-1453.56 164.66,-1453.56 214.66,-1453.56 314.66,-1453.56 514.66,-1453.56 564.66,-1453.56 614.66,-1453.56 714.66,-1453.56 764.66,-1453.56 864.66,-1453.56 914.66,-1453.56 964.66,-1453.56 1014.66,-1453.56 1064.66,-1453.56 1114.66,-1453.56 1514.66,-1453.56 1564.66,-1453.56 1614.66,-1453.56 89.66,-1403.56 139.66,-1403.56 189.66,-1403.56 289.66,-1403.56 339.66,-1403.56 489.66,-1403.56 589.66,-1403.56 639.66,-1403.56 739.66,-1403.56 789.66,-1403.56 839.66,-1403.56 889.66,-1403.56 939.66,-1403.56 989.66,-1403.56 1039.66,-1403.56 1089.66,-1403.56 1139.66,-1403.56 1189.66,-1403.56 1289.66,-1403.56 1489.66,-1403.56 1539.66,-1403.56 1589.66,-1403.56 64.66,-1353.56 114.66,-1353.56 164.66,-1353.56 214.66,-1353.56 514.66,-1353.56 564.66,-1353.56 614.66,-1353.56 714.66,-1353.56 764.66,-1353.56 864.66,-1353.56 914.66,-1353.56 964.66,-1353.56 1014.66,-1353.56 1064.66,-1353.56 1114.66,-1353.56 1164.66,-1353.56 1214.66,-1353.56 1514.66,-1353.56 1564.66,-1353.56 1614.66,-1353.56 89.66,-1303.56 139.66,-1303.56 189.66,-1303.56 339.66,-1303.56 489.66,-1303.56 589.66,-1303.56 639.66,-1303.56 739.66,-1303.56 789.66,-1303.56 839.66,-1303.56 889.66,-1303.56 939.66,-1303.56 989.66,-1303.56 1039.66,-1303.56 1089.66,-1303.56 1139.66,-1303.56 1189.66,-1303.56 1239.66,-1303.56 1489.66,-1303.56 1539.66,-1303.56 1589.66,-1303.56 64.66,-1253.56 114.66,-1253.56 164.66,-1253.56 214.66,-1253.56 564.66,-1253.56 614.66,-1253.56 714.66,-1253.56 764.66,-1253.56 864.66,-1253.56 914.66,-1253.56 964.66,-1253.56 1014.66,-1253.56 1064.66,-1253.56 1514.66,-1253.56 1564.66,-1253.56 1614.66,-1253.56 89.66,-1203.56 139.66,-1203.56 189.66,-1203.56 339.66,-1203.56 739.66,-1203.56 789.66,-1203.56 839.66,-1203.56 889.66,-1203.56 1039.66,-1203.56 1139.66,-1203.56 1189.66,-1203.56 1239.66,-1203.56 1489.66,-1203.56 1539.66,-1203.56 1589.66,-1203.56 64.66,-1153.56 114.66,-1153.56 164.66,-1153.56 214.66,-1153.56 714.66,-1153.56 764.66,-1153.56 864.66,-1153.56 1064.66,-1153.56 1114.66,-1153.56 1164.66,-1153.56 1214.66,-1153.56 1514.66,-1153.56 1564.66,-1153.56 1614.66,-1153.56 739.66,-1103.56 789.66,-1103.56 839.66,-1103.56 889.66,-1103.56 1139.66,-1103.56 1189.66,-1103.56 1239.66,-1103.56 1489.66,-1103.56 1539.66,-1103.56 1589.66,-1103.56 64.66,-1053.56 114.66,-1053.56 164.66,-1053.56 214.66,-1053.56 714.66,-1053.56 764.66,-1053.56 864.66,-1053.56 1064.66,-1053.56 1514.66,-1053.56 1564.66,-1053.56 1614.66,-1053.56 89.66,-1003.56 139.66,-1003.56 189.66,-1003.56 739.66,-1003.56 789.66,-1003.56 839.66,-1003.56 889.66,-1003.56 1039.66,-1003.56 1089.66,-1003.56 1139.66,-1003.56 1189.66,-1003.56 1239.66,-1003.56 1289.66,-1003.56 1339.66,-1003.56 1489.66,-1003.56 1539.66,-1003.56 1589.66,-1003.56 64.66,-953.56 114.66,-953.56 164.66,-953.56 214.66,-953.56 714.66,-953.56 764.66,-953.56 864.66,-953.56 1064.66,-953.56 1114.66,-953.56 1164.66,-953.56 1214.66,-953.56 1264.66,-953.56 1314.66,-953.56 1514.66,-953.56 1564.66,-953.56 1614.66,-953.56 89.66,-903.56 139.66,-903.56 189.66,-903.56 489.66,-903.56 739.66,-903.56 789.66,-903.56 839.66,-903.56 889.66,-903.56 1039.66,-903.56 1089.66,-903.56 1139.66,-903.56 1189.66,-903.56 1239.66,-903.56 1289.66,-903.56 1339.66,-903.56 1489.66,-903.56 1539.66,-903.56 1589.66,-903.56 64.66,-853.56 114.66,-853.56 164.66,-853.56 214.66,-853.56 714.66,-853.56 764.66,-853.56 864.66,-853.56 1114.66,-853.56 1164.66,-853.56 1214.66,-853.56 1264.66,-853.56 1314.66,-853.56 1514.66,-853.56 1564.66,-853.56 1614.66,-853.56 89.66,-803.56 139.66,-803.56 189.66,-803.56 739.66,-803.56 789.66,-803.56 839.66,-803.56 1139.66,-803.56 1189.66,-803.56 1239.66,-803.56 1289.66,-803.56 1339.66,-803.56 1489.66,-803.56 1539.66,-803.56 1589.66,-803.56 64.66,-753.56 114.66,-753.56 164.66,-753.56 214.66,-753.56 614.66,-753.56 914.66,-753.56 1114.66,-753.56 1264.66,-753.56 1314.66,-753.56 1514.66,-753.56 1564.66,-753.56 1614.66,-753.56 89.66,-703.56 139.66,-703.56 189.66,-703.56 639.66,-703.56 839.66,-703.56 889.66,-703.56 1289.66,-703.56 1339.66,-703.56 1489.66,-703.56 1539.66,-703.56 1589.66,-703.56 64.66,-653.56 114.66,-653.56 164.66,-653.56 214.66,-653.56 614.66,-653.56 664.66,-653.56 814.66,-653.56 1314.66,-653.56 89.66,-603.56 139.66,-603.56 189.66,-603.56 639.66,-603.56 689.66,-603.56 839.66,-603.56 1039.66,-603.56 1289.66,-603.56 1339.66,-603.56 64.66,-553.56 114.66,-553.56 164.66,-553.56 214.66,-553.56 1314.66,-553.56 89.66,-503.56 139.66,-503.56 189.66,-503.56 1289.66,-503.56 1339.66,-503.56 64.66,-453.56 114.66,-453.56 164.66,-453.56 214.66,-453.56 1314.66,-453.56 1514.66,-453.56 1564.66,-453.56 1614.66,-453.56 89.66,-403.56 139.66,-403.56 189.66,-403.56 1289.66,-403.56 1339.66,-403.56 64.66,-353.56 114.66,-353.56 164.66,-353.56 214.66,-353.56 1314.66,-353.56 1364.66,-353.56 1414.66,-353.56 89.66,-303.56 139.66,-303.56 189.66,-303.56 1289.66,-303.56 1339.66,-303.56 1389.66,-303.56 64.66,-253.56 114.66,-253.56 164.66,-253.56 214.66,-253.56 364.66,-253.56 414.66,-253.56 464.66,-253.56 514.66,-253.56 764.66,-253.56 814.66,-253.56 864.66,-253.56 914.66,-253.56 964.66,-253.56 1014.66,-253.56 1064.66,-253.56 1114.66,-253.56 1164.66,-253.56 1214.66,-253.56 1264.66,-253.56 1314.66,-253.56 1364.66,-253.56 1614.66,-253.56 189.66,-203.56 389.66,-203.56 439.66,-203.56 489.66,-203.56 639.66,-203.56 689.66,-203.56 739.66,-203.56 789.66,-203.56 839.66,-203.56 889.66,-203.56 939.66,-203.56 989.66,-203.56 1039.66,-203.56 1089.66,-203.56 1139.66,-203.56 1189.66,-203.56 1239.66,-203.56 1289.66,-203.56 1439.66,-203.56 1489.66,-203.56 214.66,-153.56 264.66,-153.56 1414.66,-153.56 1464.66,-153.56 239.66,-103.56 289.66,-103.56 1339.66,-103.56 1389.66,-103.56 1439.66,-103.56 214.66,-53.56 264.66,-53.56 314.66,-53.56 364.66,-53.56 414.66,-53.56 464.66,-53.56 514.66,-53.56 564.66,-53.56 614.66,-53.56 664.66,-53.56 714.66,-53.56 764.66,-53.56 814.66,-53.56 864.66,-53.56 914.66,-53.56 964.66,-53.56 1014.66,-53.56 1064.66,-53.56 1114.66,-53.56 1164.66,-53.56 1214.66,-53.56 1264.66,-53.56 1314.66,-53.56 1364.66,-53.56 1414.66,-53.56 1464.66,-53.56
I2C_CLK: TP4.1 U2.14 | length 3062.5
  Top Layer w7: v2(1295.28,-95.28) 1505,-305 1523.54,-305 1560,-341.46 TP4.1
  Bottom Layer w7: U2.14 250,-1569.17 250,-198.07 352.8,-95.28 v2(1295.28,-95.28)
I2C_SDA: TP5.1 U2.11 | length 2882.8
  Top Layer w7: v2(1295,-145) 1485,-335 1485,-575 1505,-595 TP5.1
  Bottom Layer w7: U2.11 300,-1319.17 300,-215 370,-145 v2(1295,-145)
MISO: U2.10 U3.15 | length 484
  Top Layer w7: U2.10@414.5,-1332.73 498.23,-1249 498.23,-998.14 525.36,-971 v2(529.2,-971)
  Bottom Layer w7: v2@529.21,-970.98 U3.15
MOSI: U2.15 U3.14 | length 925.9
  Top Layer w7: U2.15@414.5,-1832.73 538.73,-1708.5 v2(538.73,-1021.47)
  Bottom Layer w7: v2(538.73,-1021.47) 538.98,-1021.22 601.46,-1021.22 U3.14
NetD1_2: D1.2 R2.1 | length 60.4
  Top Layer w23.62: D1.2@186.17,-1097.59 R2.1
NetD2_2: D2.2 R3.1 | length 71.3
  Top Layer w23.62: D2.2 R3.1 R3.1
NetD3_2: D3.2 R4.1 | length 71.2
  Top Layer w23.62: D3.2@186.17,-2081.84 R4.1
OSC1: C4.2 U3.8 Y1.1 | length 369.7
  Bottom Layer w7: U3.8 965.7,-1171.97 1053.23,-1171.97 1133.23,-1251.97 Y1.1 1137.71,-1253.03 1153.65,-1268.97 C4.2
OSC2: C5.2 U3.7 Y1.2 | length 363.3
  Bottom Layer w7: U3.7 965.7,-1121.97 1072.17,-1121.97 Y1.2 1152.17,-1041.97 1290.23,-1041.97 C5.2
RESET: R1.1 U3.17 | length 94.5
  Bottom Layer w7: R1.1 510.72,-870.97 U3.17
SCLK: U2.9 U3.13 | length 333.9
  Bottom Layer w7: U2.9@425.26,-1221.97 414.5,-1232.73 467.47,-1232.73 493.23,-1206.97 493.23,-1096.97 518.23,-1071.97 600.71,-1071.97 U3.13
V_BAT: U2.30
VCC: C1.2 C2.2 C3.2 R1.2 R2.2 U1.3 U2.1 U3.18 | length 541.7
  Top Layer w23.62: R2.2 350,-1057.11 350,-831.14
  Bottom Layer w23.62: v2(508.23,-776.97) R1.2 541.42,-810.47 551.92,-820.97 U3.18 ; U1.3 1095,-690.97
pads on no net: U1.5 U2.3 U2.4 U2.5 U2.6 U2.7 U2.12 U2.13 U2.16 U2.17 U2.18 U2.19 U2.20 U2.23 U2.24 U2.25 U2.26 U2.27 U2.28 U3.3 U3.4 U3.5 U3.6 U3.10 U3.11 U3.12

## Polygon pours and split planes (outlines as drawn)
GND on Bottom Layer "GND_L04_P002" (solid, remove dead copper, pour order 2): 0,-2559.06 1673.23,-2559.06 1673.23,0 0,0
VCC on Bottom Layer "VCC_L04_P000" (solid, pour order 0): 358.23,-296.97 353.23,-301.97 353.23,-516.97 728.23,-516.97 1063.23,-516.97 1063.23,-711.97 1263.23,-711.97 1263.23,-336.97 1223.23,-296.97
GND on Top Layer "GND_L01_P003" (solid, remove dead copper, pour order 3): 0,-2559.06 1673.23,-2559.06 1673.23,0 0,0
VCC on Top Layer "VCC_L01_P001" (solid, pour order 1): 330,-296.97 330,-881.97 575,-881.97 575,-556.97 1233.23,-556.97 1233.23,-666.97 1233.23,-716.97 1265,-716.97 1265,-296.97
GND on GND_2 (split plane): 1653.13,-2538.96 20.1,-2538.96 20.1,-20.1 1653.13,-20.1
GND on GND_1 (split plane): 1653.13,-2538.96 20.1,-2538.96 20.1,-20.1 1653.13,-20.1

## Keep-outs
Keep-Out Layer:
  circle w19.68: c118.11,-2440.94 r66.93
  circle w19.68: c1555.12,-118.11 r66.93
  circle w19.68: c1555.12,-2440.94 r66.93
  circle w19.68: c118.11,-118.11 r66.93
  lines w50: 0,-2559.06 0,0 1673.23,0 1673.23,-2559.06 0,-2559.06

## Silkscreen, mask and mechanical layers (free items; w line width, h text height)
Top Overlay:
  drawing of 11 lines, arcs and shapes, not listed
  text "CLK" at 1510,-485 h39.37
  text "SDA" at 1505,-740 h39.37
  text "3V3" at 90,-1215 h39.37
  text "CAN" at 90,-1705 h39.37
  text "GND" at 1155,-2155 h39.37
  text "CANL" at 752.1,-2157.1 h39.37
  text "CANH" at 525,-2160 h39.37
  text "ERROR" at 90,-2200 h39.37
Bottom Overlay:
  lines w8.4: 500,-2485 500,-1913.78 1310,-1913.78 1310,-2485 500,-2485
  text "Helmet_HUD / IGEN 330 /  / Team: / Kenny Wakaba / Jack Mills / Jared Good / Felipe Diaz / Felipe Nunes / Channel Robertson /  / 3/7/2023" at 520,-2420 h30 r270
Mechanical 1:
  circle w0.5: c1555.12,-2440.94 r66.93
  circle w0.5: c118.11,-118.11 r66.93
  circle w0.5: c152.7,-1097.59 r59.06
  circle w0.5: c1555.12,-118.11 r66.93
  circle w0.5: c118.11,-2440.94 r66.93
  circle w0.5: c152.7,-1589.71 r59.06
  circle w0.5: c152.7,-2081.84 r59.06
  lines w0.5: 0,-984.25 0,-2559.06 ; 1663.23,-2559.06 1663.23,0 ; 1673.23,-2559.06 0,-2559.06 ; 1673.23,0 0,0 0,-2559.06